# EAGLE board HomeSenseBasic (EAGLE 8.6.0)
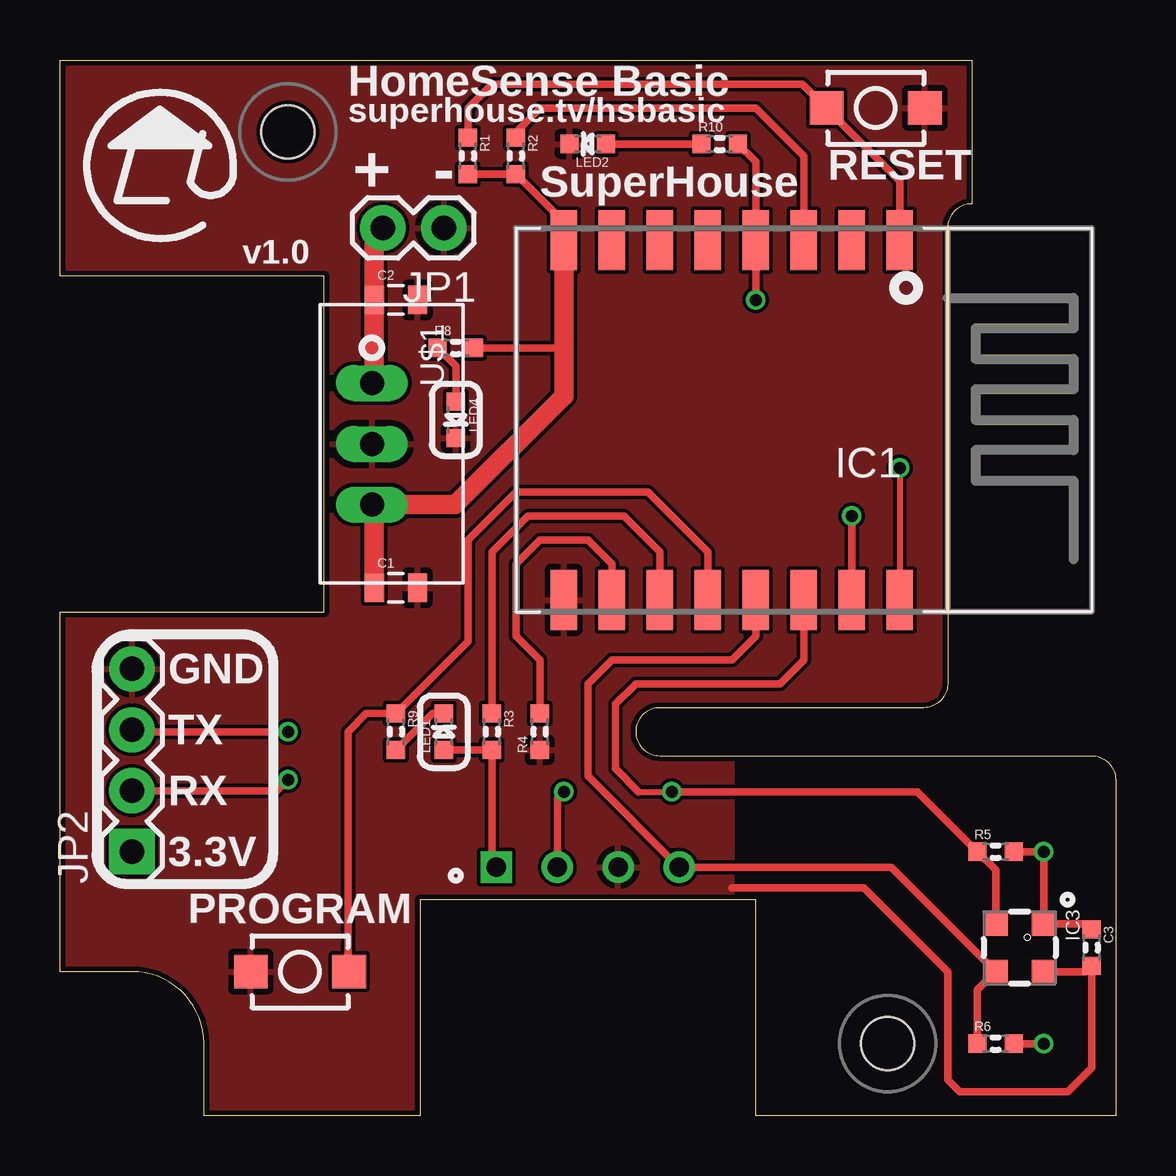
[diagram p0: board, top side]
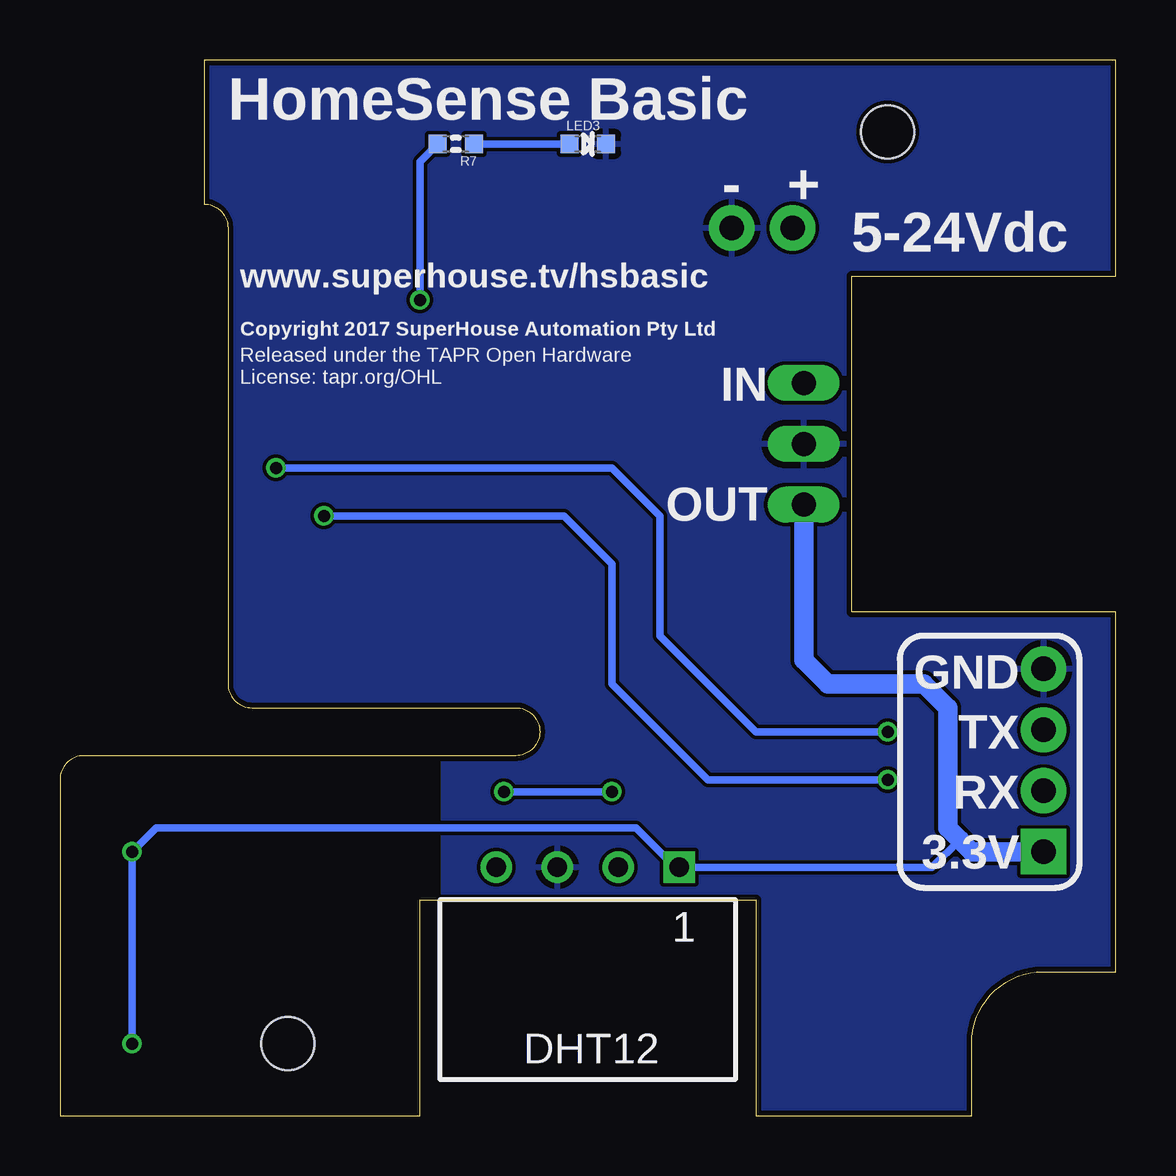
[diagram p1: board, bottom side, seen from below]

Size 44 x 44 mm. Coordinates in mm from the lower left corner, seen from the top.
Outline: 0,6 0,21 11,21 11,35 0,35 0,44 38,44 38,38 arc90 37,37 37,18 arc-90 36,17 25,17 arc90 24,16 arc90 25,15 43,15 arc-90 44,14 44,0 29,0 29,9 15,9 15,0 6,0 6,3 arc90 3,6 0,6
Copper layers (1*16): Top 0.035mm / dielectric 1.5mm / Bottom 0.035mm
Design rules "ElectroDragon_2layer_DRU_no_angle_20140221": minimum track width 6mil, minimum drill 12mil, track to track 6mil, track to pad 6mil, pad to pad 6mil, via to via 6mil, smd to smd 6mil, copper to edge 8mil, drill to drill 6mil, minimum pad ring 10mil, minimum via ring 6mil, stop-mask expansion 4mil, vias tented up to drill 100mil, thermal gap 10mil
Net classes: 0 default: width 0.203 mm, drill 0.356 mm, clearance 0.152 mm; 1 power: width 0.203 mm, clearance 0.152 mm
Holes 2.2 mm at 34.5,3 9.5,41

## Footprints (pad centres in the part's own frame; a part is rotated, then mirrored left to right if it is on the bottom)
0805 = smd 0.8 x 1.2: 1 -0.9,0; 2 0.9,0
0603 = smd 0.762 x 0.762: 1 -0.762,0; 2 0.762,0
ESP12 = smd 1.1 x 2.5: 1 -4,-7.5; 2 -2,-7.5; 3 0,-7.5; 4 2,-7.5; 5 4,-7.5; 6 6,-7.5; 7 8,-7.5; 8 10,-7.5; 9 10,7.5; 10 8,7.5; 11 6,7.5; 12 4,7.5; 13 2,7.5; 14 0,7.5; 15 -2,7.5; 16 -4,7.5
MS5637 = smd 1 x 1: 1 -1,1; 2 -1,-1; 3 1,-1; 4 1,1
DHT12 = drill 0.8 square: 1 -3.81,-4.35 | drill 0.8: 2 -1.27,-4.35; 3 1.27,-4.35; 4 3.81,-4.35
1X02 = drill 1.016 pad 1.88: 1 0,0; 2 2.54,0
1X04 = drill 1.016 pad 1.88 square: 1 0,0 | drill 1.016 pad 1.88: 2 2.54,0; 3 5.08,0; 4 7.62,0
LED-0603 = smd 0.762 x 0.762: A -0.762,0; C 0.762,0
TACTILE_SWITCH_SMD_2PIN_TINY = smd 1.4 x 1.4: 1 -2.05,0; 2 2.05,0
K78XX-500R3 = drill 1 long: 1 -2.54,0; 2 0,0; 3 2.54,0

## Placement (x,y rotation side)
C1  10uF  [0805]  14,22 0 top
C2  10uF  [0805]  14,34 0 top
C3  100nF  [0603]  43,7 270 top
IC1  ESP12SMT  [ESP12]  31,29 180 top
IC3  MS563702BA03  [MS5637]  40,7 270 top
IC4  DHT12  [DHT12]  22,6 180 bottom
JP1  [1X02]  16,37 180 top
JP2  [1X04]  3,11 90 top
LED1  RED  [LED-0603]  16,16 90 top
LED2  GREEN  [LED-0603]  22,40.5 180 top
LED3  GREEN  [LED-0603]  22,40.5 0 bottom
LED4  BLUE  [LED-0603]  16.5,29 270 top
R1  10K  [0603]  17,40 270 top
R2  10K  [0603]  19,40 270 top
R3  10K  [0603]  18,16 270 top
R4  10K  [0603]  20,16 90 top
R5  4K7  [0603]  39,11 0 top
R6  4K7  [0603]  39,3 0 top
R7  1K  [0603]  27.5,40.5 180 bottom
R8  4K7  [0603]  16.5,32 0 top
R9  1K  [0603]  14,16 270 top
R10  1K  [0603]  27.5,40.5 0 top
S1  RESET  [TACTILE_SWITCH_SMD_2PIN_TINY]  34,42 0 top
S2  PROGRAM  [TACTILE_SWITCH_SMD_2PIN_TINY]  10,6 0 top
U$1  K7803-500R3  [K78XX-500R3]  13,28 270 top

## Library data of the parts
C1-C3 IC1 IC3 IC4 JP1 JP2 LED1-LED4 R1-R10 S1 S2 U$1 = freetronics-jon

## Nets
3.3V: C1.1 C3.1 IC1.8 IC3.1 IC4.1 JP2.1 LED1.A R1.2 R2.2 R3.2 R5.2 R6.2 R8.2 U$1.3
ADC: IC1.2
CH_PD: IC1.3 R2.1
GND: C1.2 C2.2 C3.2 IC1.9 IC3.4 IC4.3 JP1.1 JP2.4 LED2.C LED3.C LED4.C R4.1 S1.2 S2.1 U$1.2
GPIO0: IC1.12 R9.1 S2.2
GPIO2: IC1.11 R3.1
GPIO12: IC1.6
GPIO13: IC1.7
GPIO14: IC1.5
GPIO15: IC1.10 R4.2
GPIO16: IC1.4 R7.2 R10.2
N$1: C2.1 JP1.2 U$1.1
N$2: LED4.A R8.1
N$3: LED1.C R9.2
N$4: LED2.A R10.1
N$11: LED3.A R7.1
RESET: IC1.1 R1.1 S1.1
RXD: IC1.15 JP2.2
SCL: IC1.13 IC3.3 IC4.4 R6.1
SDA: IC1.14 IC3.2 IC4.2 R5.1
TXD: IC1.16 JP2.3

## Tracks (layer width: path | path; a pad name or v marks a point on that pad's centre or on a via)
3.3V  (via drill 0.5)
  Top 0.254: 21,37.24 IC1.8 | 18,10.54 IC4.1 | C3.1 42.76,8
  Top 0.305: v41,3 R6.2 | R5.2 v41,11 IC3.1 42.76,8 | LED1.A R3.2 18,10.54 | R1.2 R2.2 21,37.24 | R8.2 21,32
  Top 0.813: IC1.8 21,32 21,30 16.46,25.46 U$1.3 13.1,25.36 C1.1
  Bottom 0.254: 18.35,10.35 IC4.1
  Bottom 0.305: v41,3 v41,11 40,12 20,12 18.35,10.35 | IC4.1 7.65,10.35 6.5,11.5
  Bottom 0.813: JP2.1 6,11 6.5,11.5 7,12 7,17 8,18 12,18 13,19 U$1.3
CH_PD
  Top 0.254: 19,41 R2.1
  Top 0.305: IC1.3 31,40 29,42 20,42 19,41
GND
  Top 0.305: IC3.4 42.76,6 C3.2 43,2 42,1 37.5,1 37,1.5 37,6 33.5,9.5 28,9.5
  pour Top: 0,6 3,6 arc-90 6,3 6,0 15,0 15,9 28,9 28,15 25,15 arc-90 24,16 arc-90 25,17 36,17 arc90 37,18 37,37 arc-90 38,38 38,44 0,44 0,35 11,35 11,21 0,21
  pour Bottom: 38,44 0,44 0,35 11,35 11,21 0,21 0,6 3,6 arc-90 6,3 6,0 15,0 15,9 28,9 28,15 25,15 arc-90 24,16 arc-90 25,17 36,17 arc90 37,18 37,37 arc-90 38,38
GPIO0
  Top 0.254: 12,6.05 S2.2
  Top 0.305: IC1.12 27,23.5 24.5,26 19,26 17,24 17,19.76 R9.1 12.76,16.76 12,16 12,6.05
GPIO2
  Top 0.305: R3.1 18,23.5 19.5,25 23.5,25 25,23.5 IC1.11
GPIO15
  Top 0.305: R4.2 20,19 19,20 19,23 20,24 22,24 23,23 IC1.10
GPIO16  (via drill 0.5)
  Top 0.305: R10.2 29,39.76 IC1.4 v29,34
  Bottom 0.305: v29,34 29,39.76 R10.2
N$1
  Top 0.813: JP1.2 13.1,36.64 C2.1 13.1,30.64 U$1.1
N$2
  Top 0.305: LED4.A 16.5,31.24 R8.1
N$3
  Top 0.305: R9.2 15.52,16.76 LED1.C
N$4
  Top 0.305: LED2.A R10.1
N$11
  Bottom 0.305: LED3.A R7.1
RESET
  Top 0.305: IC1.1 35,38.95 S1.1 30.95,43 18,43 17,42 R1.1
RXD  (via drill 0.5)
  Top 0.305: v33,25 IC1.15 | v9.5,14 9.04,13.54 JP2.2
  Bottom 0.305: v9.5,14 17,14 21,18 21,23 23,25 v33,25
SCL
  Top 0.305: R6.1 38.24,5.24 IC3.3 34.65,10.35 IC4.4 22,14.16 22,18 23,19 28,19 29,20 IC1.13
SDA  (via drill 0.5)
  Top 0.254: 24.12,13.5 v25.5,13.5
  Top 0.305: IC3.2 39,10.24 R5.1 35.74,13.5 v25.5,13.5 | IC1.14 31,19 30,18 24,18 23.15,17.15 23.15,14.47 24.12,13.5 | IC4.2 20.73,13.23 v21,13.5
  Bottom 0.305: v21,13.5 v25.5,13.5
TXD  (via drill 0.5)
  Top 0.254: v35,27 IC1.16 | 3.08,16 JP2.3
  Top 0.305: v9.5,16 3.08,16
  Bottom 0.305: v9.5,16 15,16 19,20 19,25 21,27 v35,27

## Text on the board
tPlace: HomeSense Basic | superhouse.tv/hsbasic | RESET | + | - | SuperHouse | v1.0 | GND | TX | RX | 3.3V | PROGRAM
bPlace: HomeSense Basic | + | - | 5-24Vdc | www.superhouse.tv/hsbasic | Copyright 2017 SuperHouse Automation Pty Ltd | IN | Released under the TAPR Open Hardware / License: tapr.org/OHL | OUT | GND | TX | RX | 3.3V